# Altium PCB PCB1.PcbDoc
Units mm, origin at the board's own origin, x right, y up, seen from the top; angles counter-clockwise.
Board outline 35.43 x 77.22 mm, 2 copper layers (Top Layer, Bottom Layer); 5 components, 2 nets, 40 pads, 22 vias.
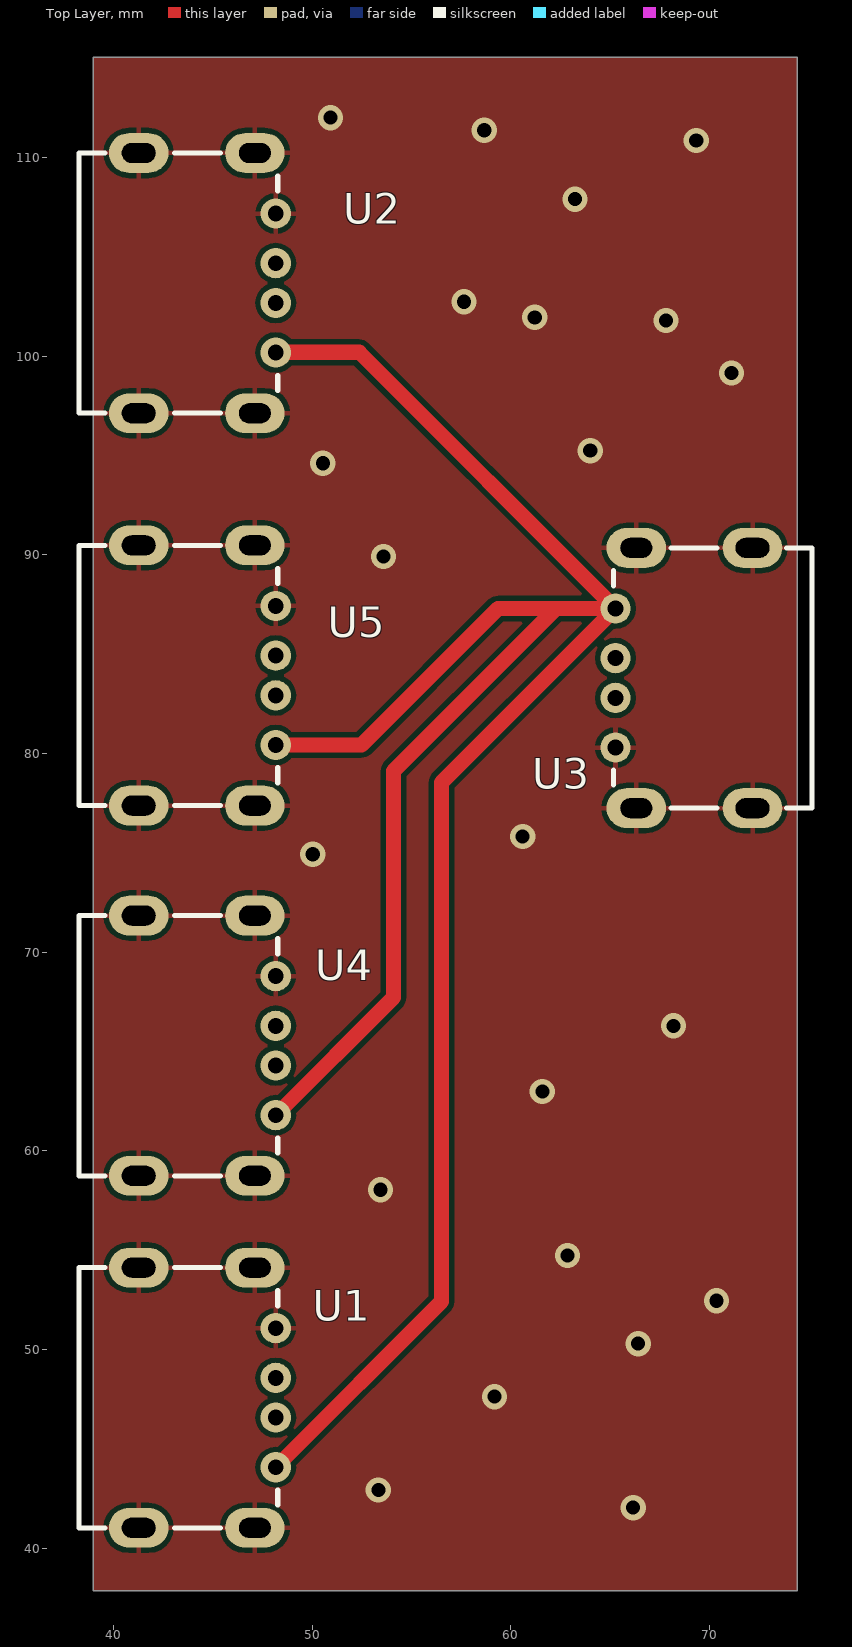
[diagram p0: Top Layer view]
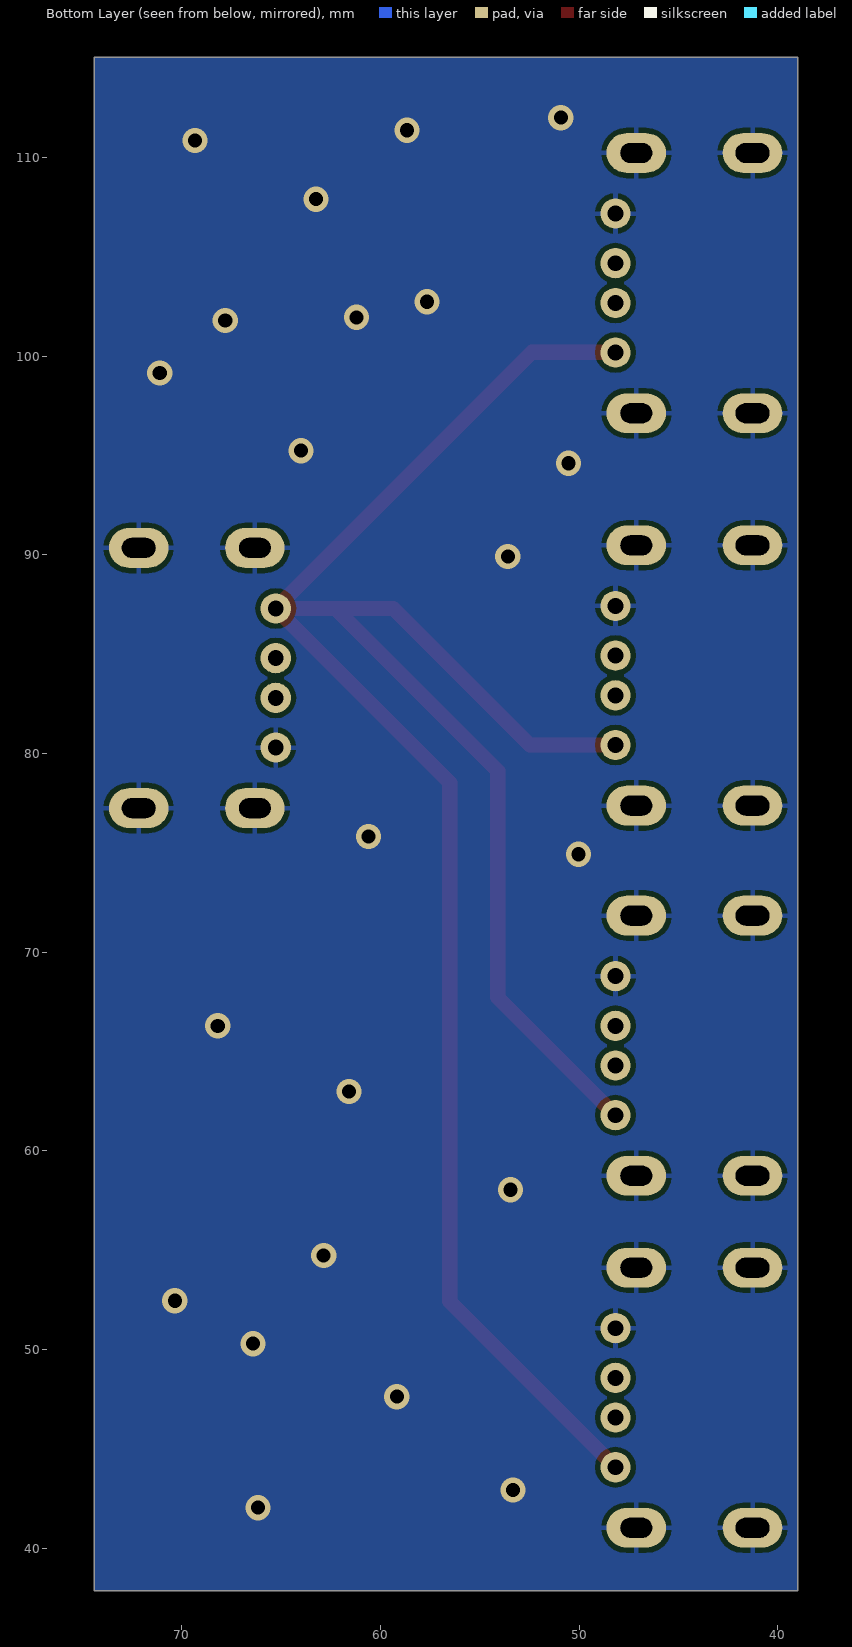
[diagram p1: Bottom Layer view, seen from below]

## Layer stack, top to bottom
Top Solder: solder mask 0.0102, Solder Resist, Dk 3.5
Top Layer: signal copper 0.0356
Dielectric 1: dielectric 0.32, FR-4, Dk 4.8
Bottom Layer: signal copper 0.0356
Bottom Solder: solder mask 0.0102, Solder Resist, Dk 3.5

## Board outline
38.989,37.846 38.989,115.062 74.422,115.062 74.422,37.846

## Design rules (kind name [scope] priority, off if disabled: settings)
Clearance [All] p1: gap=0.254 ignorepadtopadclearanceinfootprint=FALSE except(0: Arc-Hole Track-Hole SMDPad-Hole THPad-Hole Via-Hole Fill-Hole Poly-Hole Region-Hole Text-Hole)
PlaneConnect [All] p1: pad.planeconnectstyle=Relief pad.reliefexpansion=0.508 pad.reliefentries=4 pad.reliefconductorwidth=0.254 pad.reliefairgap=0.254 via.planeconnectstyle=Direct via.reliefexpansion=0.508 via.reliefentries=4 via.reliefconductorwidth=0.254 via.reliefairgap=0.254
PolygonConnect [All] p1: thpad.connectstyle=Relief thpad.reliefconductorwidth=0.254 thpad.reliefentries=4 thpad.polygonreliefangle="90 Angle" thpad.airgapwidth=0.254 smdpad.connectstyle=Relief smdpad.reliefconductorwidth=0.254 smdpad.reliefentries=4 smdpad.polygonreliefangle="90 Angle" smdpad.airgapwidth=0.254 via.connectstyle=Direct via.reliefconductorwidth=0.254 via.reliefentries=4 via.polygonreliefangle="90 Angle" via.airgapwidth=0.254
RoutingVias [All] p1: holewidth=0.711 width=1.27 viastyle="Through Hole" minholewidth=0.711 minwidth=1.27 maxholewidth=0.711 maxwidth=1.27
SolderMaskExpansion [All] p1: expansion=0.102
Width [All] p1: maxlimit=1.27 minlimit=0.127 preferedwidth=0.254 minimp=50.000000 maximp=50.000000 favimp=50.000000
29 further rules are at their usual default settings.

## Components (designator, comment, footprint, x,y, rotation, side; value= is the part's Value field where it differs from the comment)
U1 "USB-A-Female-SMD" USB-A-SMD 48.175,44.071 r90 top
U2 "USB-A-Female-SMD" USB-A-SMD 48.175,100.186 r90 top
U3 "USB-A-Female-SMD" USB-A-SMD 65.278,87.304 r270 top
U4 "USB-A-Female-SMD" USB-A-SMD 48.175,61.794 r90 top
U5 "USB-A-Female-SMD" USB-A-SMD 48.175,80.431 r90 top

## Footprints (in the part's own frame and the unit in brackets; to place one, negate y for a bottom-side part, rotate by r counter-clockwise, add the part's x,y. Pads: shape width x height; smd on the part's side, far side on the other; paste and mask are expansions set on the pad)
USB-A-SMD [mm]
  round 1.524 hole 0.8: 1(0,0) 2(2.5,0) 3(4.5,0) 4(7,0)
  oval 2x3 hole 1 slot 1.6 at 90 deg: 5(10.05,1.05) 8(-3.05,1.05)
  oval 2x3 hole 1 slot 1.7 at 90 deg: 6(10.05,6.9) 7(-3.05,6.9)
  silkscreen extent -3.05,-0.1 10.05,9.9, body extent -3.56,-0.13 10.54,9.91, height 6.7

## Via types
v1: diameter 1.27, hole 0.711, Top Layer to Bottom Layer, 22 vias

## Nets (pads, with @x,y where several pads share a name; then routed paths per layer and width w, separated by ;. In a path a pad name is that pad's centre, name@x,y a point inside that pad or via, vN(x,y) a via of type N, cw(c..) or ccw(c..) an arc to the next point about the centre after c; other vN are vias at no path point)
gnd: U1.4 U1.5 U1.6 U1.7 U1.8 U2.4 U2.5 U2.6 U2.7 U2.8 U3.4 U3.5 U3.6 U3.7 U3.8 U4.4 U4.5 U4.6 U4.7 U4.8 U5.4 U5.5 U5.6 U5.7 U5.8
  other v1: 66.167,42.037 53.34,42.926 59.182,47.625 66.421,50.292 70.358,52.451 62.865,54.737 53.455,58.039 61.595,62.992 68.199,66.294 50.038,74.93 60.605,75.819 53.594,89.916 50.546,94.615 64.008,95.25 71.12,99.161 67.818,101.799 61.214,101.961 57.658,102.743 63.246,107.911 69.342,110.868 58.674,111.379 50.927,112.014
vcc: U1.1 U2.1 U3.1 U4.1 U5.1 | length 124.1
  Top Layer w0.254: U2.1 U2.1@48.192,100.203
  Top Layer w0.762: U1.1 56.515,52.411 56.515,78.541 U3.1 ; U4.1 54.102,67.721 54.102,79.121 62.285,87.304 ; U5.1 52.491,80.431 59.364,87.304 62.285,87.304 ; U2.1@48.192,100.203 52.379,100.203 U3.1 ; 62.285,87.304 U3.1
pads on no net: U1.2 U1.3 U2.2 U2.3 U3.2 U3.3 U4.2 U4.3 U5.2 U5.3

## Polygon pours and split planes (outlines as drawn)
gnd on Bottom Layer "GND_L02_P000" (solid, remove dead copper, pour order 0): 38.989,37.846 38.989,115.062 74.422,115.062 74.422,37.846
gnd on Top Layer "GND_L01_P001" (solid, remove dead copper, pour order 1): 38.989,37.846 38.989,115.062 74.422,115.062 74.422,37.846

## Silkscreen, mask and mechanical layers (free items; w line width, h text height)
Mechanical 1:
  the board outline again, w0.254

## Text inside footprints (layer, text, board x,y; h text height)
U1: Mechanical 13 "PCB Edge" at 38.65,53.342 h0.25 r270
U2: Mechanical 13 "PCB Edge" at 38.65,109.457 h0.25 r270
U3: Mechanical 13 "PCB Edge" at 74.803,78.033 h0.25 r90
U4: Mechanical 13 "PCB Edge" at 38.65,71.065 h0.25 r270
U5: Mechanical 13 "PCB Edge" at 38.65,89.702 h0.25 r270